# Altium PCB Slave.PcbDoc
Units mil, origin at the board's own origin, x right, y up, seen from the top; angles counter-clockwise.
Board outline 6000 x 4000 mil, 2 copper layers (Top Layer, Bottom Layer); 22 components, 20 nets, 93 pads, 0 vias.
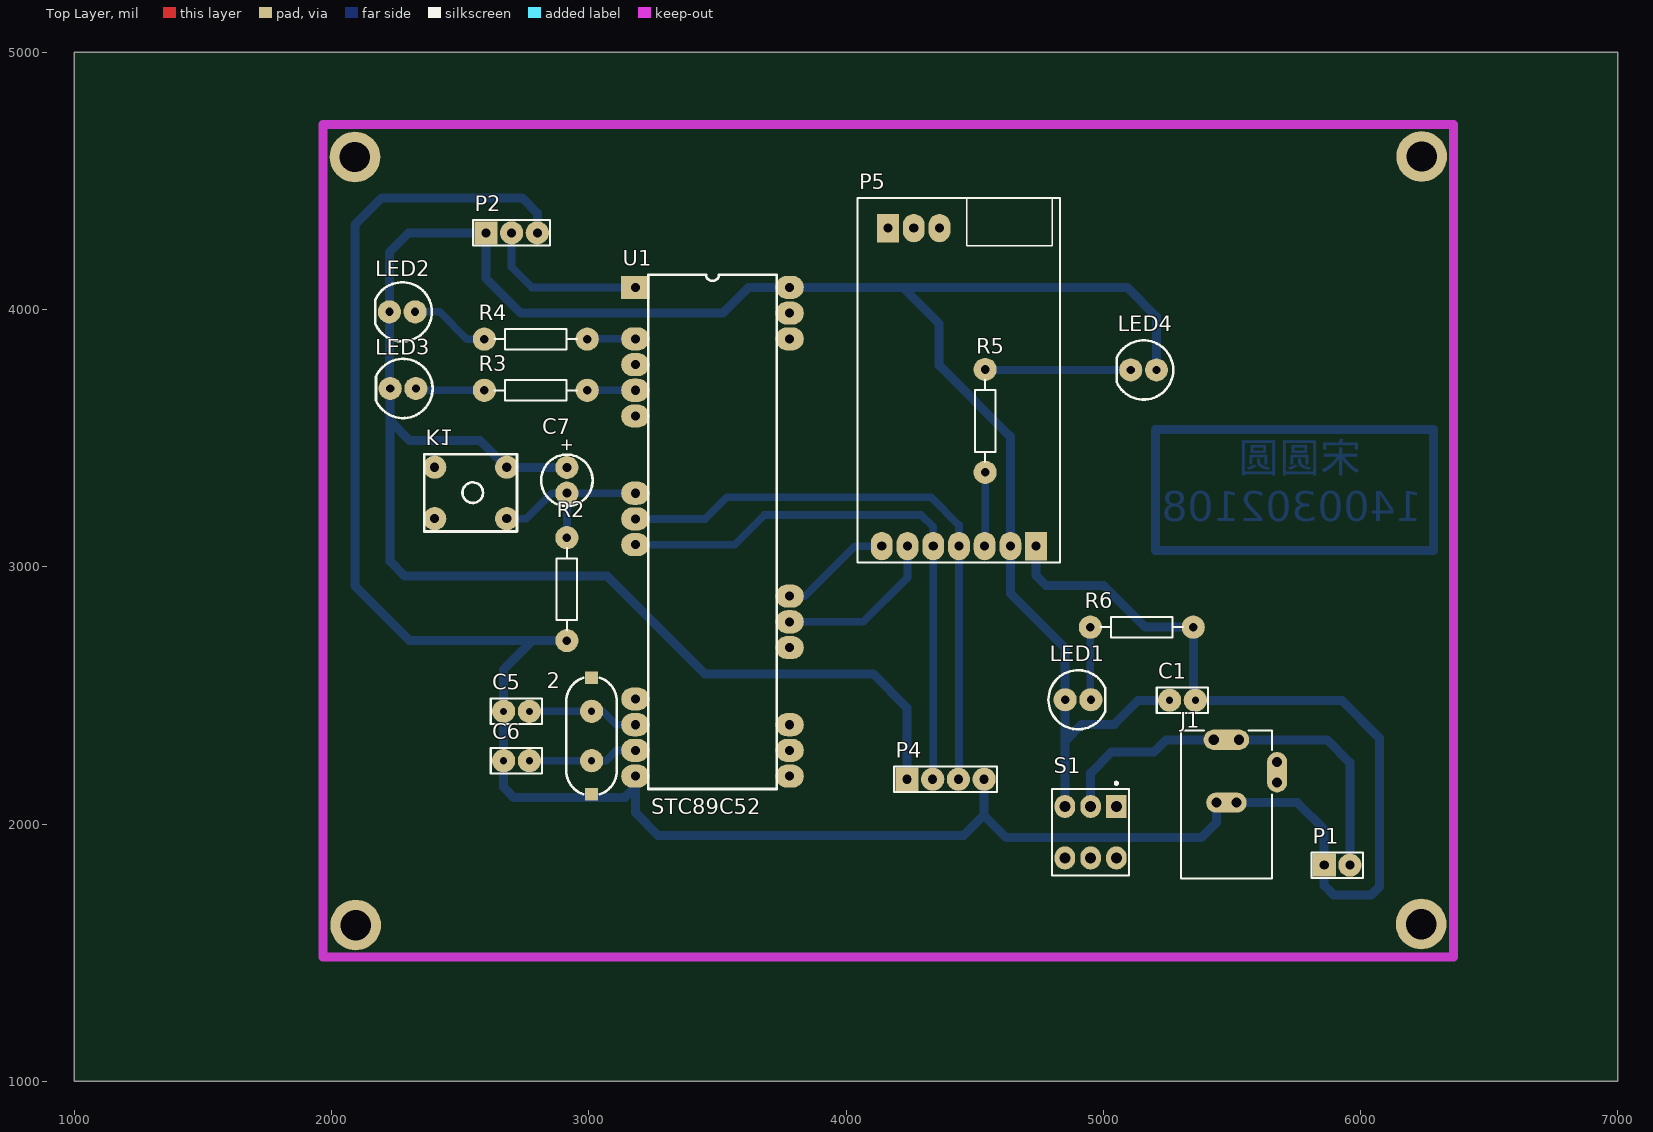
[diagram p0: Top Layer view]
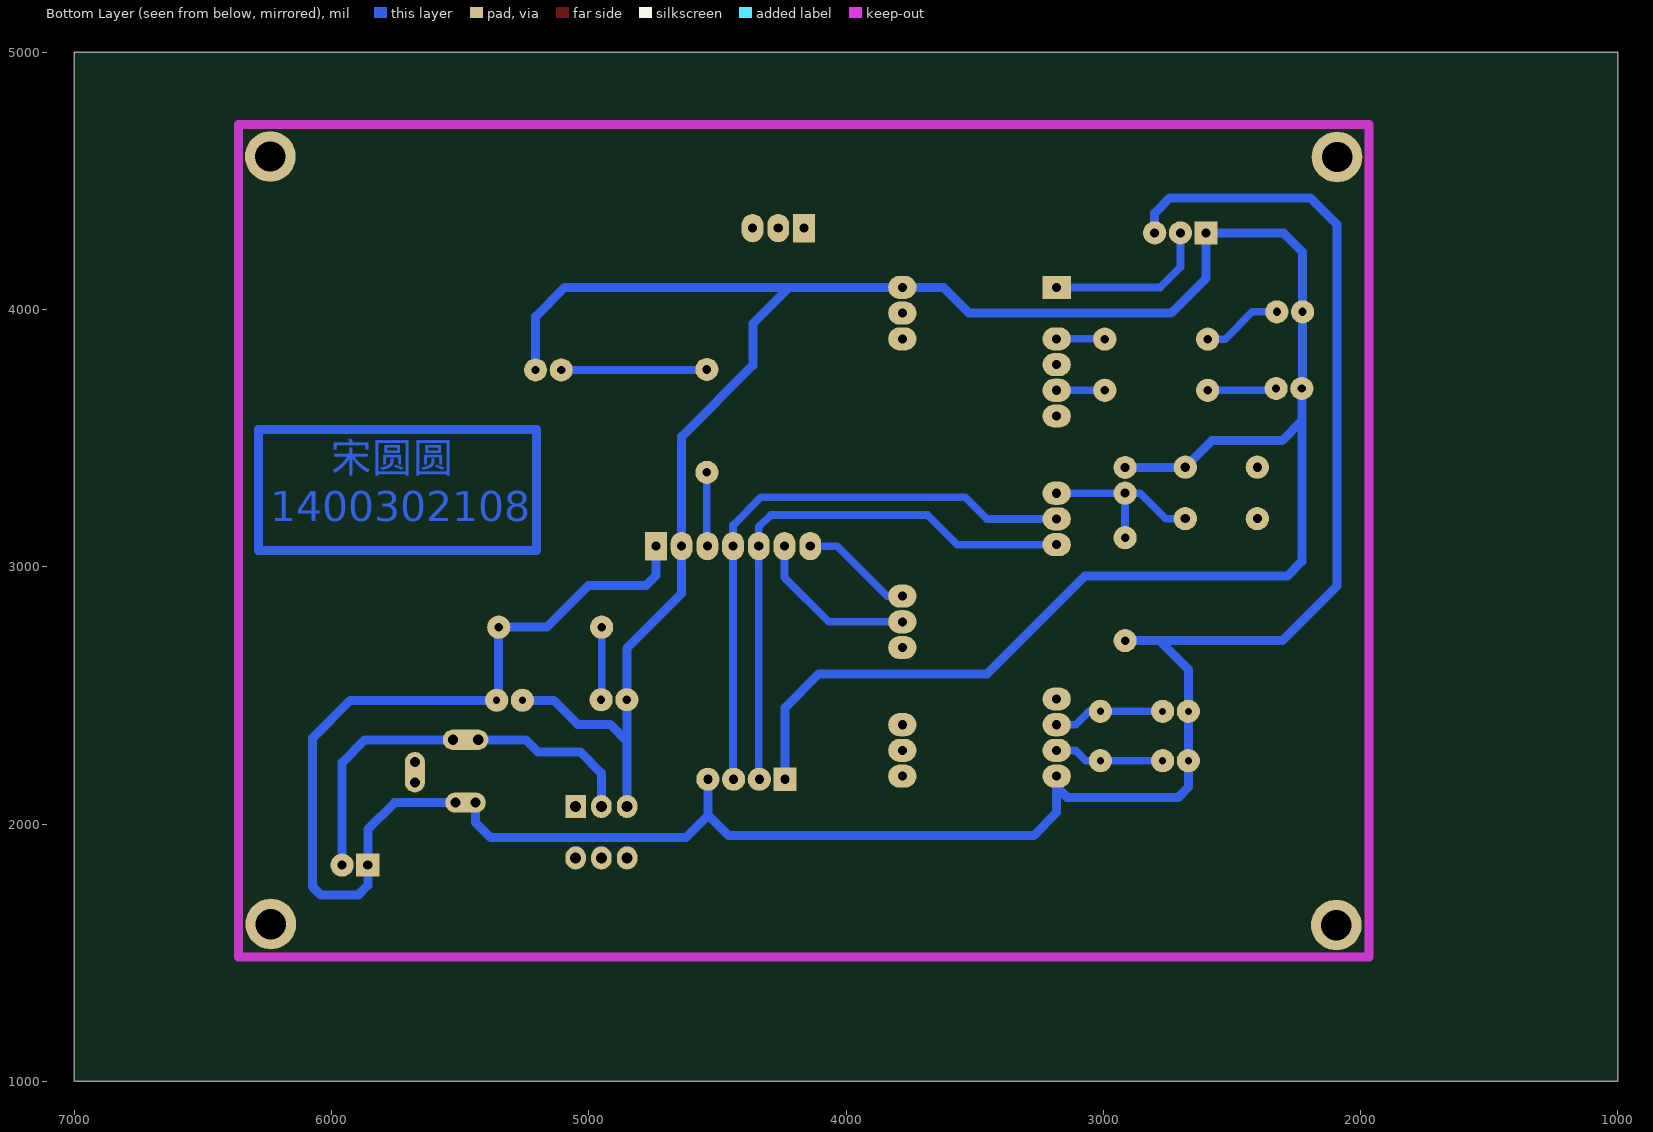
[diagram p1: Bottom Layer view, seen from below]

## Layer stack, top to bottom
Top Layer: signal copper 1.4
Dielectric: dielectric 12.6, FR-4, Dk 4.8
Bottom Layer: signal copper 1.4

## Board outline
1000,1000 7000,1000 7000,5000 1000,5000

## Design rules (kind name [scope] priority, off if disabled: settings)
Clearance [All] p1: gap=10
ComponentClearance [All] p1: gap=10 collisioncheckmode=3 verticalgap=0 showdistances=FALSE
PolygonConnect [All] p1: connectstyle=Relief reliefconductorwidth=10 reliefentries=4 polygonreliefangle="90 Angle" airgapwidth=10
RoutingVias [All] p1: holewidth=28 width=50 viastyle="Through Hole" minholewidth=28 minwidth=50 maxholewidth=28 maxwidth=50
SolderMaskExpansion [All] p1: expansion=4
Width [All] p1: maxlimit=40 minlimit=10 preferedwidth=30
27 further rules are at their usual default settings.

## Components (designator, comment, footprint, x,y, rotation, side; value= is the part's Value field where it differs from the comment)
2 "XTAL" XTAL_US 3011,2246 r90 top
C1 "Cap" RAD-0.1 5308,2481 r180 top
C5 "Cap" RAD-0.1 2719,2438 r0 top
C6 "Cap" RAD-0.1 2719,2246 r0 top
C7 "Cap Pol1" RB.1/.2 2915,3336 r90 top
J1 "PWR2.5" KLD-0202 5479,1788 r90 top
K1 "四脚按键" 四脚按键 2681,3187 r90 top locked
LED1 "LED" LED 4852,2483 r0 top
LED2 "LED" LED 2328,3693 r180 top
LED3 "LED" LED 2325,3991 r180 top
LED4 "LED" LED 5207,3765 r180 top
P1 "" HDR1X2 5859,1840 r0 top
P2 "DHT11" HDR1X3 2600,4298 r0 top
P4 "下载口" HDR1X4 4237,2174 r0 top
P5 "无线串口模块" AS32-TTL-100 4739,3080 r90 top
R2 "Res2" AXIAL-0.4#1 2915,2913 r270 top
R3 "Res2" AXIAL-0.4#2 2794,3686 r180 top
R4 "Res2" AXIAL-0.4#2 2794,3885 r180 top
R5 "Res2" AXIAL-0.4#2 4541,3567 r270 top
R6 "Res2" AXIAL-0.4#2 5150,2765 r0 top
S1 "SW-DPDT" SWITCH_B1 4951,1968 r270 top
U1 "STC89C51" DIP-40 3181,4086 r0 top (schematic designator U?)

## Footprints (in the part's own frame and the unit in brackets; to place one, negate y for a bottom-side part, rotate by r counter-clockwise, add the part's x,y. Pads: shape width x height; smd on the part's side, far side on the other; paste and mask are expansions set on the pad)
AS32-TTL-100 [mil]
  rect 110x85 hole 35.43 mask+1.97: 1(0,0) 1(1236.22,575.59)
  oval 110x85 hole 35.43 mask+1.97: 2(0,100) 2(1236.22,475.59) 3(0,200) 3(1236.22,375.59) 4(0,300) 5(0,400) 6(0,500) 7(0,600)
  silkscreen extent -63,-94 1355,694
AXIAL-0.4#1 [mil] "Axial Device, Thru-Hole; 2 Leads; 0.4 in Pin Spacing"
  round 90 hole 33.47: 1(-200,0)
  round 90 hole 33.46: 2(200,0)
  silkscreen extent -160,-40 160,40
AXIAL-0.4#2 [mil] "Axial Device, Thru-Hole; 2 Leads; 0.4 in Pin Spacing"
  round 90 hole 33.46: 1(-200,0) 2(200,0)
  silkscreen extent -160,-40 160,40
DIP-40 [mil]
  rect 110x90 hole 35.43: 1(0,0)
  oval 110x90 hole 35.43: 3(0,-200) 4(0,-300) 5(0,-400) 6(0,-500) 9(0,-800) 10(0,-900) 11(0,-1000) 17(0,-1600) 18(0,-1700) 19(0,-1800) 20(0,-1900) 21(600,-1900) 22(600,-1800) 23(600,-1700) 26(600,-1400) 27(600,-1300) 28(600,-1200) 38(600,-200) 39(600,-100) 40(600,0)
  silkscreen extent 50,-1950 550,50
HDR1X2 [mil] "Connector; Header; 2 Position"
  rect 90x90 hole 35.43: 1(0,0)
  round 90 hole 35.43: 2(100,0)
  silkscreen extent -50,-50 150,50
HDR1X3 [mil] "Connector; Header; 3 Position"
  rect 90x90 hole 35.43: 1(0,0)
  round 90 hole 35.43: 2(100,0) 3(200,0)
  silkscreen extent -50,-50 250,50
HDR1X4 [mil] "Connector; Header; 4 Position"
  rect 90x90 hole 35.43: 1(0,0)
  round 90 hole 35.43: 2(100,0) 3(200,0) 4(300,0)
  silkscreen extent -50,-50 350,50
KLD-0202 [mm] "DC Power Jack, 2.5mm, KLD Series, PCB Mount"
  oval 2x4.5 all layers, no hole: 1(13.7,0)
  round 1.5 hole 1: 1A(13.7,-1.25) 1B(13.7,1.25) 2A(7.5,-1) 2B(7.5,1) 3A(9.5,-5) 3B(11.5,-5)
  oval 2x4 all layers, no hole: 2(7.5,0)
  oval 4x2 all layers, no hole: 3(10.5,-5)
  silkscreen extent 0,-4.5 14.6,4.5
LED [mil]
  round 90 hole 32: 1(0,0) 2(100,0)
  silkscreen extent -65,-115 155,115
RAD-0.1 [mil] "Radial Cap, Thru-Hole; 2 Leads; 0.1 in Pin Spacing"
  round 90 hole 27.56: 1(-50,0) 2(50,0)
  silkscreen extent -100,-50 100,50
RB.1/.2 [mil]
  round 90 hole 35: 1(50,0) 2(-50,0)
  silkscreen extent -100,-100 100,100
SWITCH_B1 [mil] "单刀"
  rect 90x80 hole 43.31: 1(-100,100)
  oval 90x80 hole 43.31: 2(-100,0) 3(-100,-100) 4(100,-100) 5(100,0) 6(100,100)
  silkscreen extent -195,-150 169,150
XTAL_US [mil]
  round 90 hole 28: 1(0,0) 2(192.13,0)
  rect 50x50 smd: ""(-130.32,0) ""(322.44,0)
  silkscreen extent -131,-98 323,98
四脚按键 [mil]
  round 90 hole 35.43: 1(0,0) 2(200,0) 3(0,280) 4(200,280)
  silkscreen extent -50,-40 250,320

## Part data
2: "Crystal Oscillator"
C1 C5 C6: "Capacitor"
C7: "Polarized Capacitor (Radial)"
J1: "Low Voltage Power Supply Connector"
P1: library part "Header 2", "Header, 2-Pin"
P2: library part "Header 3", "Header, 3-Pin"
P4: library part "Header 4", "Header, 4-Pin"
P5: library part "Header 7", "Header, 7-Pin"
R2 R3 R4 R5 R6: "Resistor"
S1: "单刀双掷开关"

## Free pads (board coordinates)
  round 196.85 hole 118.11: 1(2094,1607) 2(6236,1611) 3(6238,4595) 4(2091,4593)

## Nets (pads, with @x,y where several pads share a name; then routed paths per layer and width w, separated by ;. In a path a pad name is that pad's centre, name@x,y a point inside that pad or via, vN(x,y) a via of type N, cw(c..) or ccw(c..) an arc to the next point about the centre after c; other vN are vias at no path point)
5V: J1.1 J1.1A J1.1B P1.2 S1.2 | length 1528.8
  Bottom Layer w35: S1.2 4951,2198 5033,2280 5198,2280 5245.37,2327.37 J1.1B ; J1.1A 5870.63,2327.37 5959,2239 P1.2
AUX: P5.3@4539,3080 R5.2 | length 287.8
  Bottom Layer w30: P5.3@4539,3080 4541,3082 R5.2
DATA: P2.2 U1.1 | length 646.7
  Bottom Layer w30: P2.2 2700,4165 2779,4086 U1.1
GND: C1.1 C5.1 C6.1 J1.2 J1.2A J1.2B P1.1 P2.3 P4.4 P5.1@4739,3080 R2.2 R6.2 U1.20 | length 10415.3
  Bottom Layer w35: P2.3 2800,4375 2741,4434 2196,4434 2091,4329 2091,2926 2304,2713 2781,2713 ; R2.2 2781,2713 ; 4535.5,2034.5 4456,1955 3271,1955 3181,2045 U1.20 3181,2144 3140,2103 2709,2103 2669,2143 C6.1 C5.1 2669,2601 2781,2713 ; P4.4 4537,2033 4623,1947 5381,1947 5439.63,2005.63 J1.2B ; P5.1@4739,3080 4739,2966 4777,2928 5001,2928 5164,2765 R6.2 5350,2489 C1.1 5927,2481 6074,2334 6074,1757 6041,1724 5896,1724 5859,1761 P1.1 5859,1979 5754.72,2083.28 J1.2A
LED1: R4.1 U1.3 | length 176
  Bottom Layer w30: R4.1@3005,3886 U1.3
LED2: R3.1 U1.5 | length 187
  Bottom Layer w30: R3.1 U1.5
M0: P5.7 U1.28 | length 438.4
  Bottom Layer w30: U1.28 3840,2886 4034,3080 P5.7
M1: P5.6 U1.27 | length 651.2
  Bottom Layer w30: U1.27 4067,2786 4239,2958 P5.6
NetC7_2: 
NetJ1_3: J1.3 J1.3A J1.3B
NetLED1_2: LED1.2 R6.1 | length 282.8
  Bottom Layer w30: R6.1 4950,2485 LED1.2
NetLED2_1: LED3.1 R4.2 | length 312.9
  Bottom Layer w30: LED3.1 2420,3991 2526,3885 R4.2
NetLED3_1: LED2.1 R3.2 | length 268.9
  Bottom Layer w30: LED2.1 2335,3686 R3.2
NetLED4_2: LED4.2 R5.1 | length 566.8
  Bottom Layer w30: R5.1 4543,3765 LED4.2
RESET: C7.2 K1.1 R2.1 U1.9 | length 714
  Bottom Layer w30: K1.1 2757,3187 2856,3286 C7.2 ; R2.1 C7.2 ; U1.9 C7.2
RX: P4.3 P5.4 U1.10 | length 2323.5
  Bottom Layer w30: U1.10 3453,3186 3537,3270 4331,3270 4439,3162 P5.4 P4.3@4439,2176
TX: P4.2 P5.5 U1.11 | length 2215
  Bottom Layer w30: U1.11@3187,3092 U1.11 3567,3086 3682,3201 4293,3201 4339,3155 P5.5 4339,2176 P4.2
VCC: C1.2 C7.1 K1.2 LED1.1 LED2.2 LED3.2 LED4.1 P2.1 P4.1 P5.2@4639,3080 S1.3 U1.40 | length 11220.6
  Bottom Layer w35: C7.1 2682,3386 K1.2 2578,3490 2305,3490 2228,3567 ; P4.1 4237,2452 4105,2584 3451,2584 3071,2964 2285,2964 2228,3021 2228,3567 ; S1.3 4852,2069 4852,2322 ; LED4.1 5207,3972 5093,4086 U1.40 ; C1.2 5137,2481 5043,2387 4917,2387 4852,2322 ; 2228,3567 LED2.2 2225,3696 LED3.2 2225,4223 2300,4298 P2.1 2600,4122 2736,3986 3521,3986 3621,4086 U1.40 ; U1.40 4221,4086 4362,3945 4362,3783 4639,3506 4639,3080 4639,2897 4852,2684 LED1.1 4852,2322
XTAL1: 2.1 C6.2 U1.19 | length 428.6
  Bottom Layer w30: C6.2 2.1 3068,2246 3108,2286 U1.19
XTAL2: 2.2 C5.2 U1.18 | length 433.6
  Bottom Layer w20: C5.2 C5.2@2769.13,2438.13
  Bottom Layer w30: C5.2@2769.13,2438.13 2.2 3054.87,2438.13 3107,2386 U1.18
pads on no net: 2. K1.3 K1.4 P5.1@4163.41,4316.22 P5.2@4263.41,4316.22 P5.3@4363.41,4316.22 S1.1 S1.4 S1.5 S1.6 U1.4 U1.6 U1.17 U1.21 U1.22 U1.23 U1.26 U1.38 U1.39
copper on no net: | length 3135
  Bottom Layer w35: 5204,3083 5204,3063 ; 6284,3463 6284,3533 5204,3533 5204,3063 ; 6284,3478 6284,3063 5244,3063 5204,3063

## Keep-outs
Keep-Out Layer:
  lines w35: 1966,1483 6361,1483 6361,4719 1966,4719 1966,1483

## Other copper
Bottom Layer:
  text "宋圆圆" at 6004,3328 h200
  text "1400302108" at 6239,3138 h200

## Silkscreen, mask and mechanical layers (free items; w line width, h text height)
Top Overlay:
  text "STC89C52" at 3243,2038 h60

## Dimensions
1966,4719 to 1966,1483 on Top Overlay
1966,1483 to 6361,1483 on Top Overlay

## Text inside footprints (layer, text, board x,y; h text height)
C7: Top Overlay "+" at 2935,3446 h48 r90
J1: Mechanical 1 "Alert PCB fab to slot details" at 5240.19,1799.26 h11.81 r90; Mechanical 1 "Assign keep-out area to slot" at 5220.5,1799.26 h11.81 r90; Mechanical 1 "Mech 1 - Slot cut-out" at 5259.87,1799.26 h11.81 r90; Mechanical 1 "Mech 2 - Clearance, move to internal plane if present" at 5279.56,1799.26 h11.81 r90